# Altium PCB PCB Raspberry PI zero W.PcbDoc
Units mil, origin at the board's own origin, x right, y up, seen from the top; angles counter-clockwise.
Board outline 2598.43 x 1456.69 mil, 2 copper layers (Top Layer, Bottom Layer); 10 components, 24 nets, 88 pads, 32 vias.
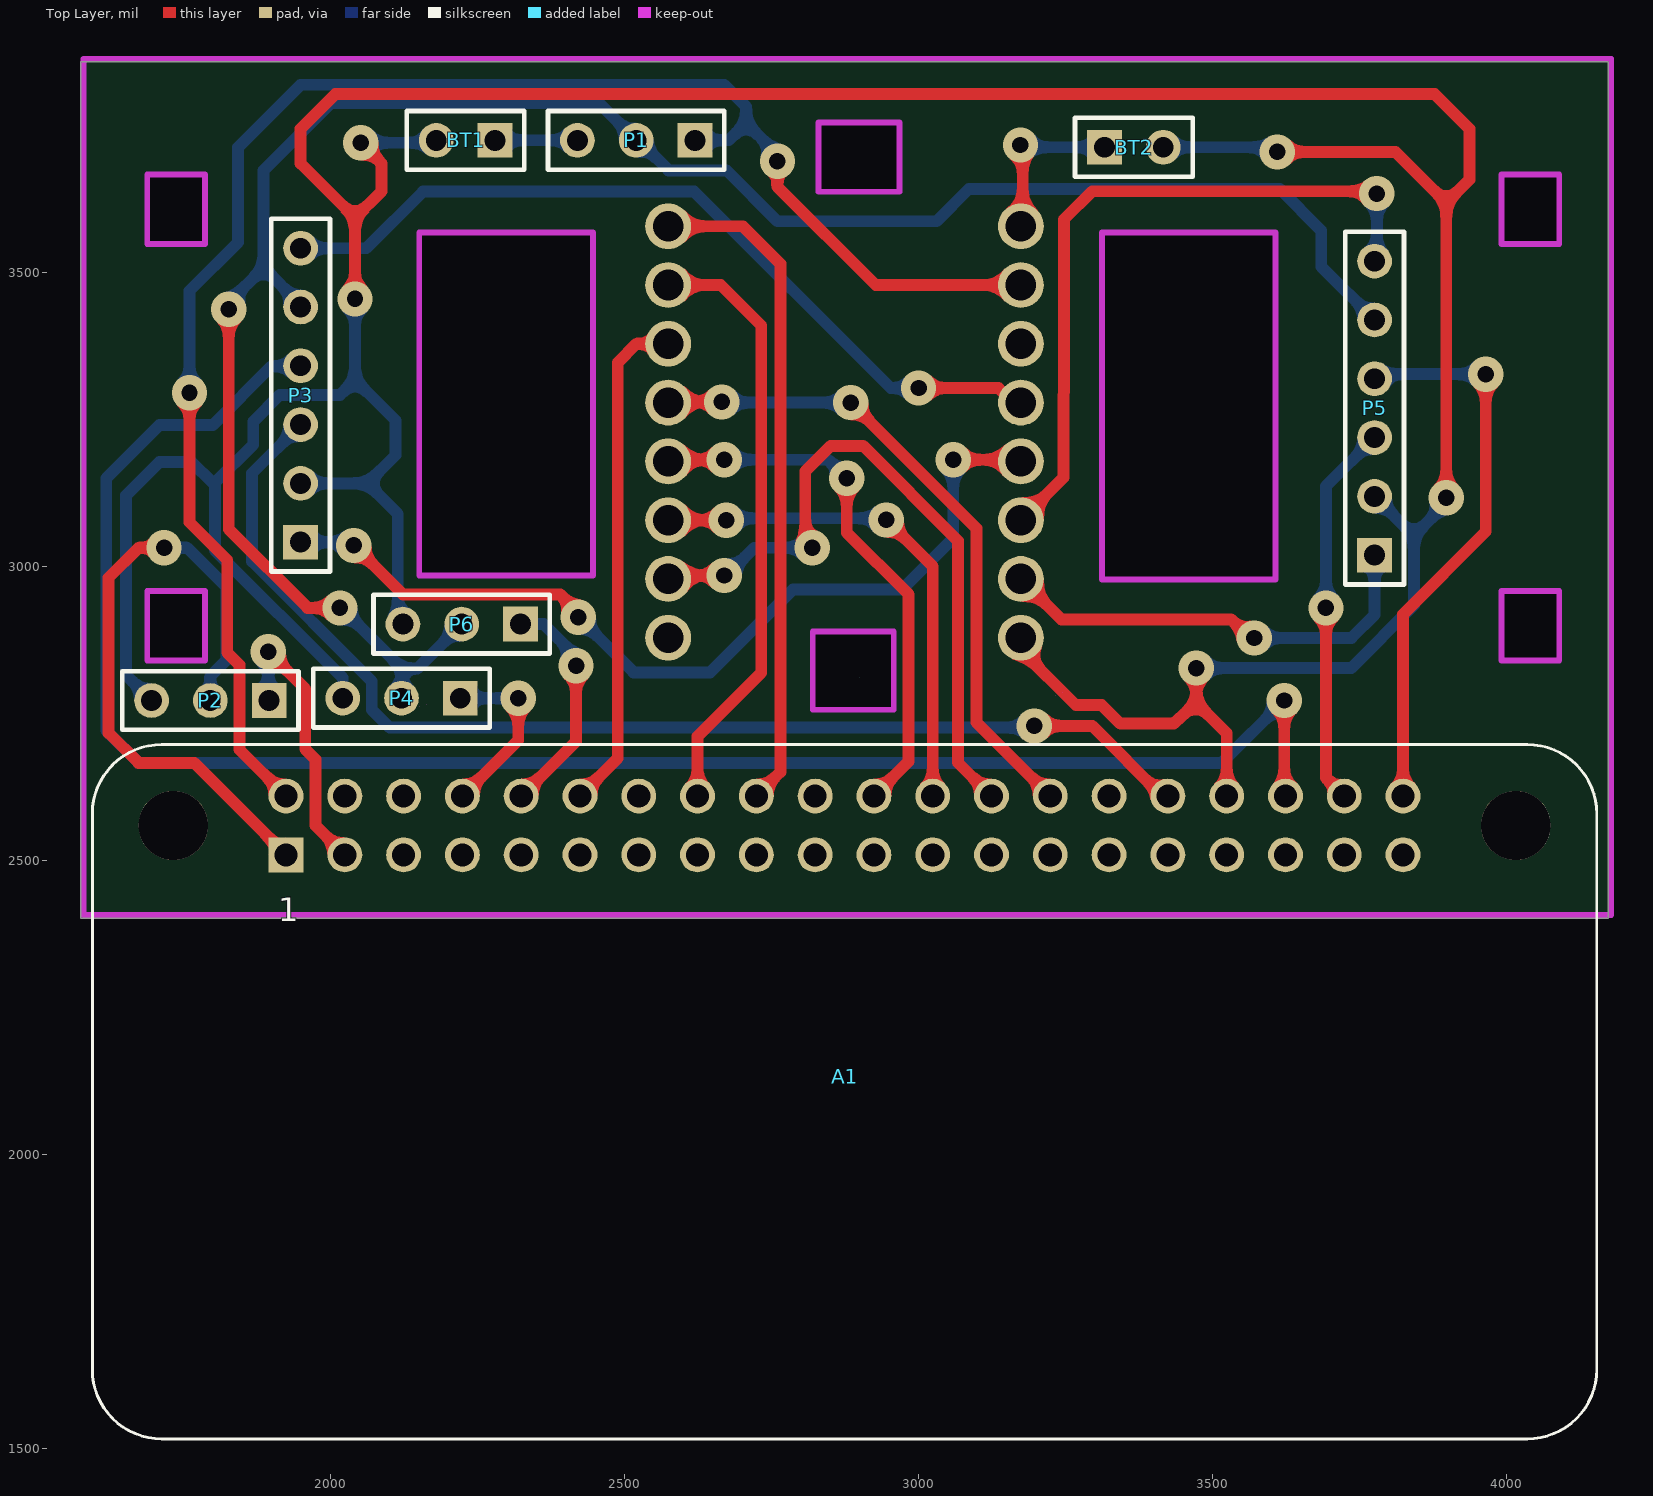
[diagram p0: Top Layer view]
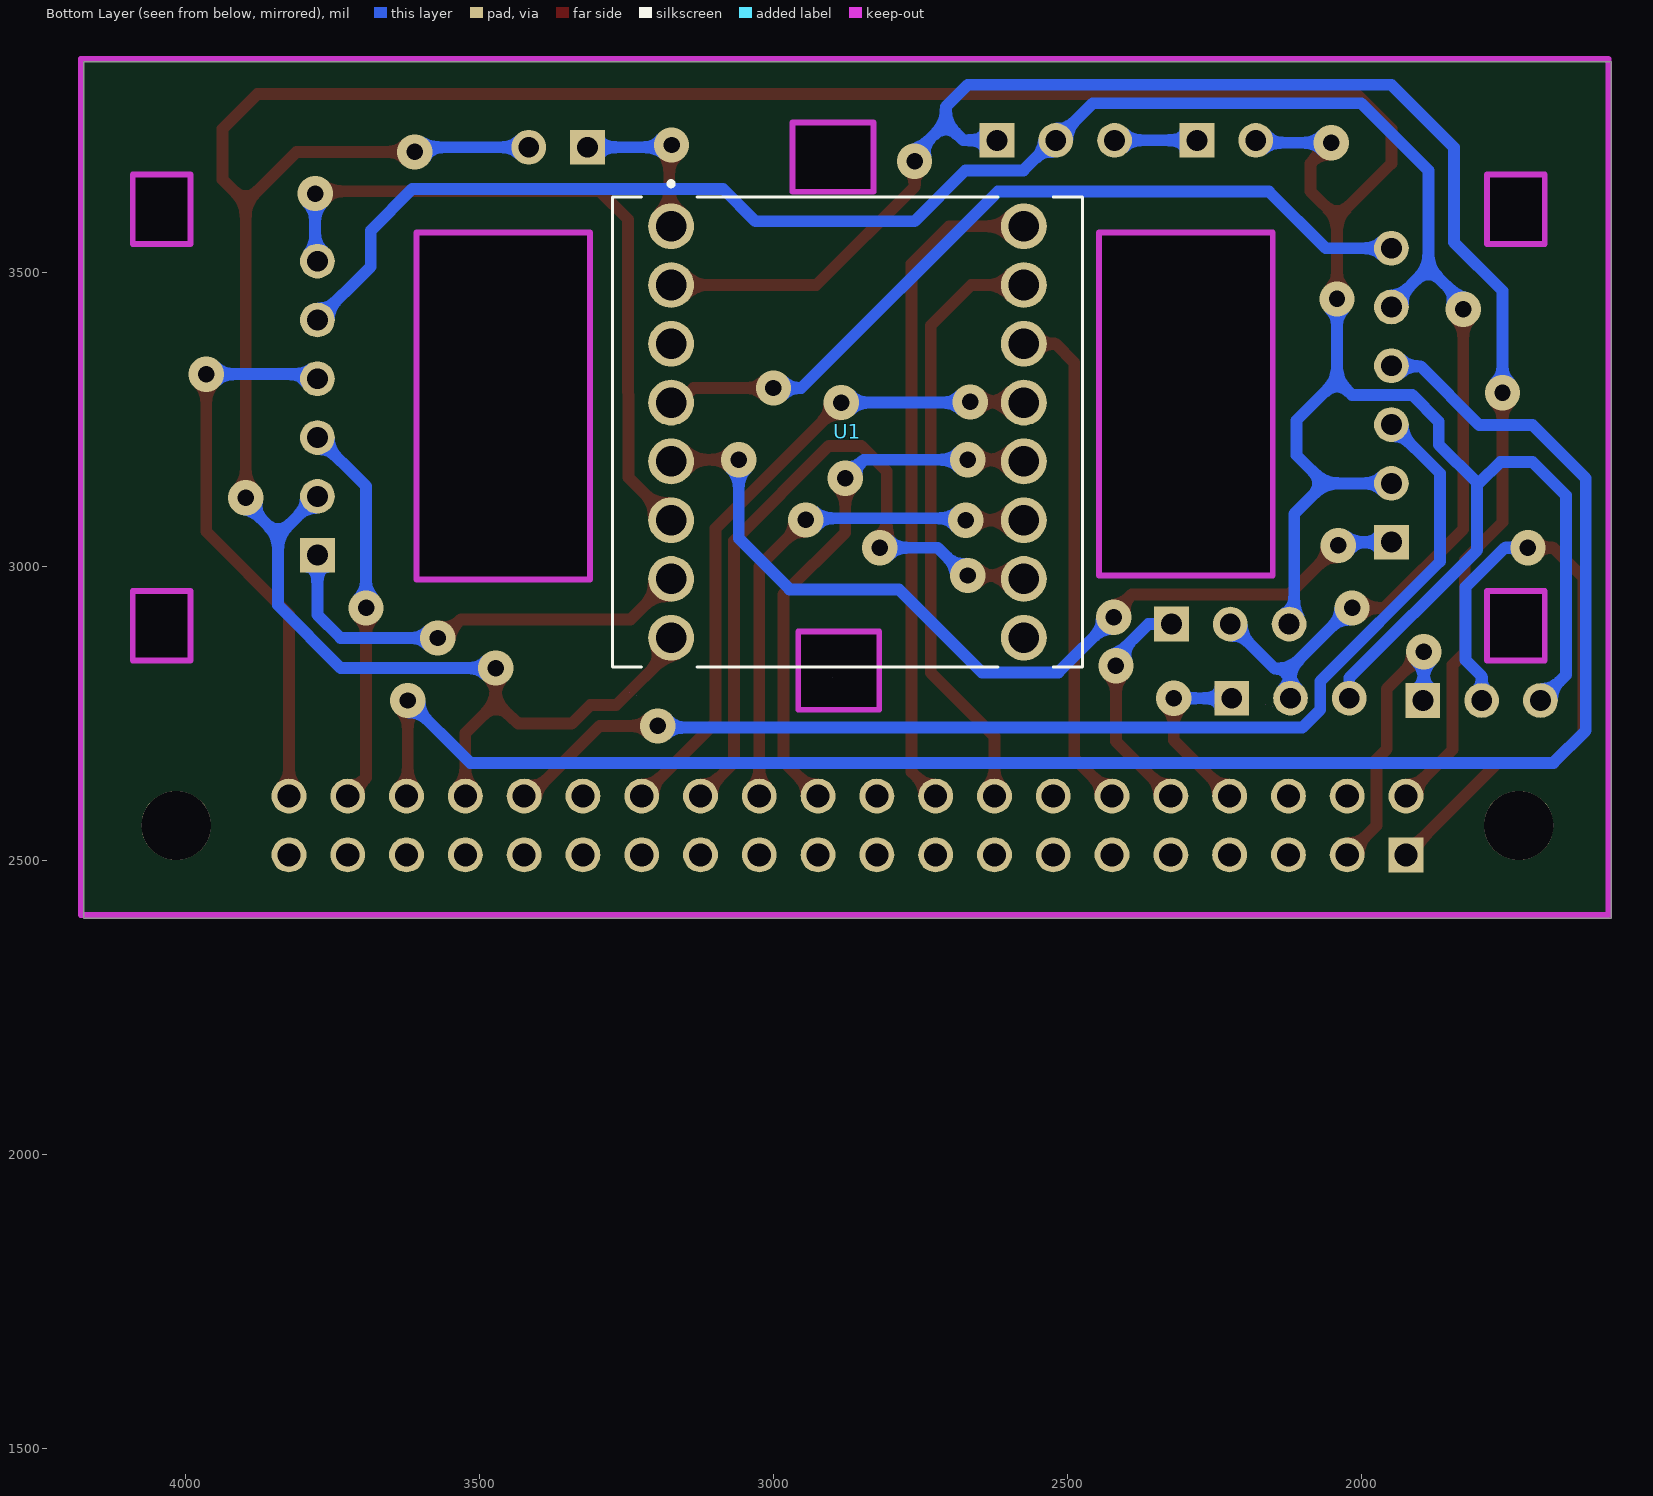
[diagram p1: Bottom Layer view, seen from below]

## Layer stack, top to bottom
Top Solder: solder mask 0.4, Solder Resist, Dk 3.5
Top Layer: signal copper 1.4
Dielectric 1: dielectric 12.6, FR-4, Dk 4.8
Bottom Layer: signal copper 1.4
Bottom Solder: solder mask 0.4, Solder Resist, Dk 3.5

## Board outline
1574.8,2401.57 4173.23,2401.57 4173.23,3858.27 1574.8,3858.27
cut-out: 2162.48,2764.84
cut-out: 2150.67,2760.91
cut-out: 2150.67,2984.25 2150.67,3567.99 2445.95,3567.99 2445.94,2984.25
cut-out: 3312.09,2977.44 3312.09,3567.99 3607.36,3567.99 3607.36,2977.44
cut-out: 3233.35,2780.59
cut-out: 3245.16,2784.53
cut-out: 2829.8,3636.89 2967.6,3636.89 2967.6,3755 2829.8,3755
cut-out: 1688.07,3548.31 1786.5,3548.31 1786.5,3666.42 1688.07,3666.42
cut-out: 1688.07,2839.65 1786.5,2839.65 1786.5,2957.76 1688.07,2957.76
cut-out: 3991.22,3548.31 4089.65,3548.31 4089.65,3666.42 3991.22,3666.42
cut-out: 3991.22,2839.65 4089.65,2839.65 4089.65,2957.76 3991.22,2957.76
cut-out: 2819.96,2888.86 2957.76,2888.86 2957.76,2755.98 2819.96,2755.98
cut-out: 2898.7,2810.12

## Design rules (kind name [scope] priority, off if disabled: settings)
AcuteAngle [All] p1: minimum=9.00000000000000E+0001 checktracksonly=FALSE
Clearance [All] p1: gap=10 ignorepadtopadclearanceinfootprint=FALSE except(0: Arc-Hole Track-Hole SMDPad-Hole THPad-Hole Via-Hole Fill-Hole Poly-Hole Region-Hole Text-Hole)
HoleSize [All] p1: absolutevalues=TRUE maxlimit=118.11 minlimit=1 maxpercent=80.000 minpercent=20.000
PolygonConnect [All] p1: connectstyle=Relief reliefconductorwidth=10 reliefentries=4 polygonreliefangle="90 Angle" airgapwidth=10
RoutingVias [All] p1: holewidth=28 width=60 viastyle="Through Hole" minholewidth=28 minwidth=60 maxholewidth=28 maxwidth=60
SolderMaskExpansion [All] p1: expansion=4
Width [All] p1: maxlimit=25 minlimit=10 preferedwidth=20 minimp=50.000000 maximp=50.000000 favimp=50.000000
29 further rules are at their usual default settings.

## Components (designator, comment, footprint, x,y, rotation, side; value= is the part's Value field where it differs from the comment)
A1 "ADA3708" ADA3708_RPI-ZERO 2874.02,2559.06 r0 top
BT1 "Battery" BAT-2 2229.53,3724.41 r180 top
BT2 "Battery" BAT-2 3366.14,3712.6 r0 top
P1 "Header 3" HDR1X3 2619.68,3724.41 r180 top
P2 "Header 3" HDR1X3 1895.28,2771.65 r180 top
P3 "Header 6" HDR1X6 1948.82,3040.94 r90 top
P4 "Header 3" HDR1X3 2220.47,2775.59 r180 top
P5 "Header 6" HDR1X6 3775.59,3018.9 r90 top
P6 "Header 3" HDR1X3 2322.83,2901.57 r180 top
U1 "ROB-14450" MODULE_ROB-14450 2874.02,3228.35 r180 bottom

## Footprints (in the part's own frame and the unit in brackets; to place one, negate y for a bottom-side part, rotate by r counter-clockwise, add the part's x,y. Pads: shape width x height; smd on the part's side, far side on the other; paste and mask are expansions set on the pad)
ADA3708_RPI-ZERO [mm]
  rect 1.508x1.508 hole 1: 1(-24.13,-1.27)
  round 1.508 hole 1: 2(-24.13,1.27) 3(-21.59,-1.27) 4(-21.59,1.27) 5(-19.05,-1.27) 6(-19.05,1.27) 7(-16.51,-1.27) 8(-16.51,1.27) 9(-13.97,-1.27) 10(-13.97,1.27) 11(-11.43,-1.27) 12(-11.43,1.27) 13(-8.89,-1.27) 14(-8.89,1.27) 15(-6.35,-1.27) 16(-6.35,1.27) 17(-3.81,-1.27) 18(-3.81,1.27) 19(-1.27,-1.27) 20(-1.27,1.27) 21(1.27,-1.27) 22(1.27,1.27) 23(3.81,-1.27) 24(3.81,1.27) 25(6.35,-1.27) 26(6.35,1.27) 27(8.89,-1.27) 28(8.89,1.27) 29(11.43,-1.27) 30(11.43,1.27) 31(13.97,-1.27) 32(13.97,1.27) 33(16.51,-1.27) 34(16.51,1.27) 35(19.05,-1.27) 36(19.05,1.27) 37(21.59,-1.27) 38(21.59,1.27) 39(24.13,-1.27) 40(24.13,1.27)
  round 0 all layers, no hole: ""(-29,-23) ""(29,-23)
  round 3 hole 3 unplated: ""(-29,0) ""(29,0)
  silkscreen extent -32.5,-26.5 32.5,3.5
BAT-2 [mm] "Battery; 2 Leads"
  rect 1.5x1.5 hole 0.9: 1(-1.27,0)
  round 1.5 hole 0.9: 2(1.27,0)
  silkscreen extent -2.54,-1.27 2.54,1.27
HDR1X3 [mm] "Connector; Header; 3 Position"
  rect 1.5x1.5 hole 0.9: 1(0,0)
  round 1.5 hole 0.9: 2(2.54,0) 3(5.08,0)
  silkscreen extent -1.27,-1.27 6.35,1.27
HDR1X6 [mm] "Connector; Header; 6 Position"
  rect 1.5x1.5 hole 0.9: 1(0,0)
  round 1.5 hole 0.9: 2(2.54,0) 3(5.08,0) 4(7.62,0) 5(10.16,0) 6(12.7,0)
  silkscreen extent -1.27,-1.27 13.97,1.27
MODULE_ROB-14450 [mm]
  round 1.98 hole 1.32: 1(-7.62,8.89) 2(-7.62,6.35) 3(-7.62,3.81) 4(-7.62,1.27) 5(-7.62,-1.27) 6(-7.62,-3.81) 7(-7.62,-6.35) 8(-7.62,-8.89) 9(7.62,-8.89) 10(7.62,-6.35) 11(7.62,-3.81) 12(7.62,-1.27) 13(7.62,1.27) 14(7.62,3.81) 15(7.62,6.35) 16(7.62,8.89)
  silkscreen extent -10.16,-10.16 10.16,10.83, body extent -10.16,-10.16 10.16,10.16, height 5.5

## Part data
A1: "Raspberry Pi Zero WH _Zero W with Headers_", Package=None, Availability=Unavailable, MF="Raspberry Pi", MP=ADA3708, Price=None, SnapEDA_Link=https://www.snapeda.com/parts/ADA3708/Raspberry%20Pi/view-part/2770118/?ref=snap
BT1 BT2: "Multicell Battery", LatestRevisionDate=17-Jul-2002, LatestRevisionNote="Re-released for DXP Platform.", PackageDescription="Battery; 2 Leads", PackageReference=BAT-2, Published=24-Mar-1999, Publisher="Altium Limited"
P1 P2 P4 P6: "Header, 3-Pin", LatestRevisionDate=17-Jul-2002, LatestRevisionNote="Re-released for DXP Platform.", Publisher="Altium Limited"
P3 P5: "Header, 6-Pin", LatestRevisionDate=17-Jul-2002, LatestRevisionNote="Re-released for DXP Platform.", Publisher="Altium Limited"
U1: "TB6612FNG Motor Controller/Driver Power Management Evaluation Board", Package=None, Availability="In Stock", Check_prices=https://www.snapeda.com/parts/ROB-14450/SparkFun%20Electronics/view-part/2656367/?ref=eda, MF="SparkFun Electronics", MP=ROB-14450, Price=None, SnapEDA_Link=https://www.snapeda.com/parts/ROB-14450/SparkFun%20Electronics/view-part/2656367/?ref=snap

## Via types
v1: diameter 60, hole 28, Top Layer to Bottom Layer, 32 vias

## Nets (pads, with @x,y where several pads share a name; then routed paths per layer and width w, separated by ;. In a path a pad name is that pad's centre, name@x,y a point inside that pad or via, vN(x,y) a via of type N, cw(c..) or ccw(c..) an arc to the next point about the centre after c; other vN are vias at no path point)
3V: A1.1 P2.2 | length 1105.7
  Top Layer w20: v1(1716.54,3031.5) 1673.23,3031.5 1622.05,2980.31 1622.05,2716.54 1673.23,2665.35 1767.72,2665.35 A1.1
  Bottom Layer w20: v1(1716.54,3031.5) 1755.91,3031.5 1822.83,2964.57 1822.83,2840.63 1795.28,2813.07 P2.2
5V: P1.2 P3.5 P4.2 P5.5 P6.2 | length 3469.3
  Top Layer w20: v1(1826.77,3437.01) 1826.77,3062.99 1960.63,2929.13 v1(2015.75,2929.13)
  Bottom Layer w20: v1(1826.77,3437.01) 1826.77,3448.82 1885.83,3507.87 ; P3.5@1946.85,3446.85 1885.83,3507.87 ; v1@2015.73,2928.3 2018.61,2928.3 2121.47,2825.44 ; P4.2 2121.47,2825.44 ; P6.2 2147.22,2825.96 2121.47,2825.44 ; P1.2 2517.72,3726.38 2456.69,3787.4 2000,3787.4 1885.83,3673.23 1885.83,3507.87 ; P1.2@2519.68,3728.35 2574.8,3673.23 2673.23,3673.23 2759.84,3586.61 3030.61,3586.61 3085.73,3641.73 3614.17,3641.73 3685.04,3570.87 3685.04,3509.45 P5.5
GND: A1.34 BT1.2 BT2.2 P2.3 P3.2 P4.3 P5.2 P6.3 U1.8 | length 7240.1
  Top Layer w20: v1(2041.34,3454.72) 2041.34,3592.52 ; v1(2051.18,3720.47) 2086.61,3685.04 2086.61,3637.8 2041.34,3592.52 ; U1.8 3174.02,2857.48 3267.72,2763.78 3311.72,2763.78 3343.21,2732.28 3434.06,2732.28 3472.44,2767.72 ; v1(3472.44,2826.77) 3472.44,2767.72 ; A1.34 3524.02,2716.14 3472.44,2767.72 ; v1(3610.24,3704.72) 3811.02,3704.72 3897.64,3618.11 ; v1(3897.64,3116.54) 3897.64,3618.11 ; 2041.34,3592.52 1948.82,3685.04 1948.82,3744.09 2007.87,3803.15 3074.8,3803.15 3877.95,3803.15 3937.01,3744.09 3937.01,3657.48 3897.64,3618.11
  Bottom Layer w20: P2.3 1652.05,2814.88 1652.05,3120.55 1708.66,3177.17 1763.78,3177.17 1799.21,3141.73 ; P3.2 2062.2,3140.94 ; P4.3 2020.47,2810.24 1803.15,3027.56 1803.15,3141.73 1868.13,3206.71 1868.13,3246.08 1913.46,3291.42 2015.83,3291.42 2041.34,3316.93 ; v1(2041.34,3454.72) 2041.34,3316.93 ; v1(2051.18,3720.47) BT1.2@2179.53,3720.47 ; P6.3 2114.17,2910.23 2114.17,3088.97 2062.2,3140.94 ; BT2.2 3602.36,3712.6 v1(3610.24,3704.72) ; v1(3472.44,2826.77) 3735.77,2826.77 3842.52,2933.52 3842.52,3051.97 ; P5.2 3842.52,3051.97 ; v1(3897.64,3116.54) 3897.64,3107.09 3842.52,3051.97 ; 2041.34,3316.93 2110.24,3248.03 2110.24,3188.98 2062.2,3140.94
NetA1_2: A1.2 P1.1 U1.2 | length 2870
  Top Layer w20: v1(1759.84,3295.28) 1759.84,3074.8 1824.01,3010.63 1824.01,2853.15 1844.8,2832.36 1844.8,2688.27 A1.2 ; v1(2759.84,3688.98) 2759.84,3645.67 2927.17,3478.35 U1.2
  Bottom Layer w20: v1(1759.84,3295.28) 1759.84,3468.5 1842.52,3551.18 1842.52,3712.6 1948.82,3818.9 2669.29,3818.9 2706.69,3781.5 2706.69,3753.94 ; P1.1 2677.17,3724.41 2706.69,3753.94 ; v1(2759.84,3688.98) 2759.84,3700.79 2706.69,3753.94
NetA1_8: A1.8 P4.1 | length 304.3
  Top Layer w20: A1.8 2318.9,2703.94 v1(2318.9,2775.59)
  Bottom Layer w20: P4.1 2279.53,2775.59 v1(2318.9,2775.59)
NetA1_10: A1.10 P6.1 | length 393.4
  Top Layer w20: A1.10 2417.32,2702.36 v1(2417.32,2830.71) v1@2417.32,2846.46
  Bottom Layer w20: P6.1 2362.21,2901.57 v1@2417.32,2846.46
NetA1_12: A1.12 U1.14 | length 863
  Top Layer w20: A1.12 2488.19,2673.23 2488.19,3346.46 2520.08,3378.35 U1.14
NetA1_16: A1.16 U1.15 | length 1032
  Top Layer w20: U1.15 2663.39,3478.35 2732.28,3409.45 2732.28,2818.9 2624.02,2710.63 A1.16
NetA1_18: A1.18 U1.16 | length 1139.8
  Top Layer w20: U1.16 2701.18,3578.35 2764.96,3514.57 2764.96,2650 A1.18
NetA1_22: A1.22 U1.12 | length 922.7
  Top Layer w20: U1.12@2576.77,3181.1 v1(2669.29,3181.1) ; v1(2877.95,3149.61) 2877.95,3057.05 2983,2952 2983,2668.04 A1.22
  Bottom Layer w20: v1(2669.29,3181.1) 2846.46,3181.1 v1(2877.95,3149.61)
NetA1_24: A1.24 U1.11 | length 875.8
  Top Layer w20: U1.11 v1(2672.83,3078.35) ; v1(2944.88,3078.74) 3024.02,2999.61 A1.24
  Bottom Layer w20: v1(2672.83,3078.35) 2675.98,3081.5 2942.13,3081.5 v1(2944.88,3078.74)
NetA1_26: A1.26 U1.10 | length 1203.1
  Top Layer w20: U1.10@2575.98,2976.38 2583.86,2984.25 v1(2669.29,2984.25) ; v1(2818.9,3031.5) 2807.09,3043.31 2807.09,3161.42 2850.39,3204.72 2905.51,3204.72 3066.93,3043.31 3066.93,2666.14 A1.26
  Bottom Layer w20: v1(2669.29,2984.25) 2673.23,2984.25 2720.47,3031.5 v1(2818.9,3031.5)
NetA1_28: A1.28 U1.13 | length 1119.3
  Top Layer w20: U1.13@2575.2,3279.53 v1(2665.35,3279.53) ; v1(2884.65,3278.35) 3098.43,3064.57 3098.43,2734.65 A1.28
  Bottom Layer w20: v1@2665.35,3278.35 v1(2884.65,3278.35)
NetA1_32: A1.32 P3.3 | length 2020.8
  Top Layer w20: v1(3196.85,2728.35) 3295.28,2728.35 3414.57,2609.06 A1.32
  Bottom Layer w20: P3.3 1866.14,3158.27 1866.14,3008.03 2070,2804.17 2070,2756.02 2100.43,2725.59 3194.09,2725.59 v1(3196.85,2728.35)
NetA1_36: A1.36 P3.4 | length 3073.3
  Top Layer w20: v1(3622.05,2771.65) 3622.05,2611.02 A1.36
  Bottom Layer w20: P3.4 1947.95,3340.08 1899.13,3340.08 1799.21,3240.16 1708.66,3240.16 1618.11,3149.61 1618.11,2720.47 1673.23,2665.35 3515.75,2665.35 v1(3622.05,2771.65)
NetA1_38: A1.38 P5.3 | length 657
  Top Layer w20: v1(3692.91,2929.13) 3692.91,2640.16 A1.38
  Bottom Layer w20: v1(3692.91,2929.13) 3692.91,3136.22 P5.3
NetA1_40: A1.40 P5.4 | length 968.2
  Top Layer w20: A1.40 3824.02,2918.5 3964.57,3059.06 v1(3964.57,3326.77)
  Bottom Layer w20: P5.4 3783.46,3326.77 v1(3964.57,3326.77)
NetBT1_1: BT1.1 P1.3 | length 140.2
  Bottom Layer w20: BT1.1 P1.3
NetBT2_1: BT2.1 U1.1 | length 274
  Top Layer w20: U1.1@3177.17,3581.5 v1@3177.17,3712.6
  Bottom Layer w20: v1@3173.23,3712.6 BT2.1
  other v1: 3173.23,3716.54
NetP3_1: P3.1 U1.5 | length 1560
  Top Layer w20: v1(2039.37,3035.43) 2122.8,2952 2390.52,2952 v1@2425.2,2917.32 ; v1(3059.06,3181.1) U1.5@3174.02,3181.1
  Bottom Layer w20: P3.1 2033.86,3040.94 v1(2039.37,3035.43) ; v1@2429.13,2929.13 2429.13,2905.51 2515.28,2819.37 2645.26,2819.37 2786.52,2960.63 2972.44,2960.63 3059.06,3047.24 v1(3059.06,3181.1)
  other v1: 2421.26,2913.39
NetP3_6: P3.6 U1.4 | length 1419.4
  Top Layer w20: v1(3000,3303.15) 3135.83,3303.15 U1.4@3167.32,3271.65
  Bottom Layer w20: P3.6 2060.63,3540.94 2157.01,3637.32 2618.58,3637.32 2952.76,3303.15 v1(3000,3303.15) ; U1.4@3167.32,3271.65 U1.4
NetP5_1: P5.1 U1.7 | length 761
  Top Layer w20: U1.7 3242.91,2909.45 3531.5,2909.45 3562.99,2877.95 v1(3570.87,2877.95)
  Bottom Layer w20: v1(3570.87,2877.95) 3736.22,2877.95 3775.59,2917.32 P5.1
NetP5_6: P5.6 U1.6 | length 1213.5
  Top Layer w20: U1.6 3246.65,3150.98 3247.3,3436.28 3247.3,3589.82 3295.28,3637.8 3771.65,3637.8 v1@3779.53,3629.92
  Bottom Layer w20: P5.6 3779.53,3522.84 v1(3779.53,3633.86)
SIGNAL: A1.3 P2.1 | length 473.8
  Top Layer w20: v1(1893.7,2854.33) 1956.69,2791.34 1956.69,2688.98 1974,2671.67 1974,2559.07 A1.3
  Bottom Layer w20: P2.1@1893.7,2779.77 v1(1893.7,2854.33)
pads on no net: A1. A1.4 A1.5 A1.6 A1.7 A1.9 A1.11 A1.13 A1.14 A1.15 A1.17 A1.19 A1.20 A1.21 A1.23 A1.25 A1.27 A1.29 A1.30 A1.31 A1.33 A1.35 A1.37 A1.39 U1.3 U1.9

## Keep-outs
Keep-Out Layer:
  lines w10: 1579.8,2406.57 4178.23,2406.57 4178.23,3863.27 1579.8,3863.27 1579.8,2406.57 ; 1688.07,2839.65 1688.07,2957.76 1786.5,2957.76 1786.5,2839.65 1688.07,2839.65 ; 1688.07,3548.31 1688.07,3666.42 1786.5,3666.42 1786.5,3548.31 1688.07,3548.31 ; 2150.67,2984.25 2150.67,3567.99 2445.95,3567.99 2445.95,2984.25 2150.67,2984.25 ; 2819.96,2755.98 2819.96,2888.86 2957.76,2888.86 2957.76,2755.98 2819.96,2755.98 ; 2829.8,3636.89 2829.8,3755 2967.6,3755 2967.6,3636.89 2829.8,3636.89 ; 3312.09,2977.44 3312.09,3567.99 3607.36,3567.99 3607.36,2977.44 3312.09,2977.44 ; 3991.22,2839.65 3991.22,2957.76 4089.65,2957.76 4089.65,2839.65 3991.22,2839.65 ; 3991.22,3548.31 3991.22,3666.42 4089.65,3666.42 4089.65,3548.31 3991.22,3548.31

## Text inside footprints (layer, text, board x,y; h text height)
A1: Top Overlay "1" at 1910.52,2396.39 h40.04